# Altium PCB PCB1.PcbDoc
Units mil, origin at the board's own origin, x right, y up, seen from the top; angles counter-clockwise.
Board outline 3100 x 2500 mil, 2 copper layers (Top Layer, Bottom Layer); 53 components, 42 nets, 219 pads, 60 vias.
Unrouted connection lines stored in the file: 36.
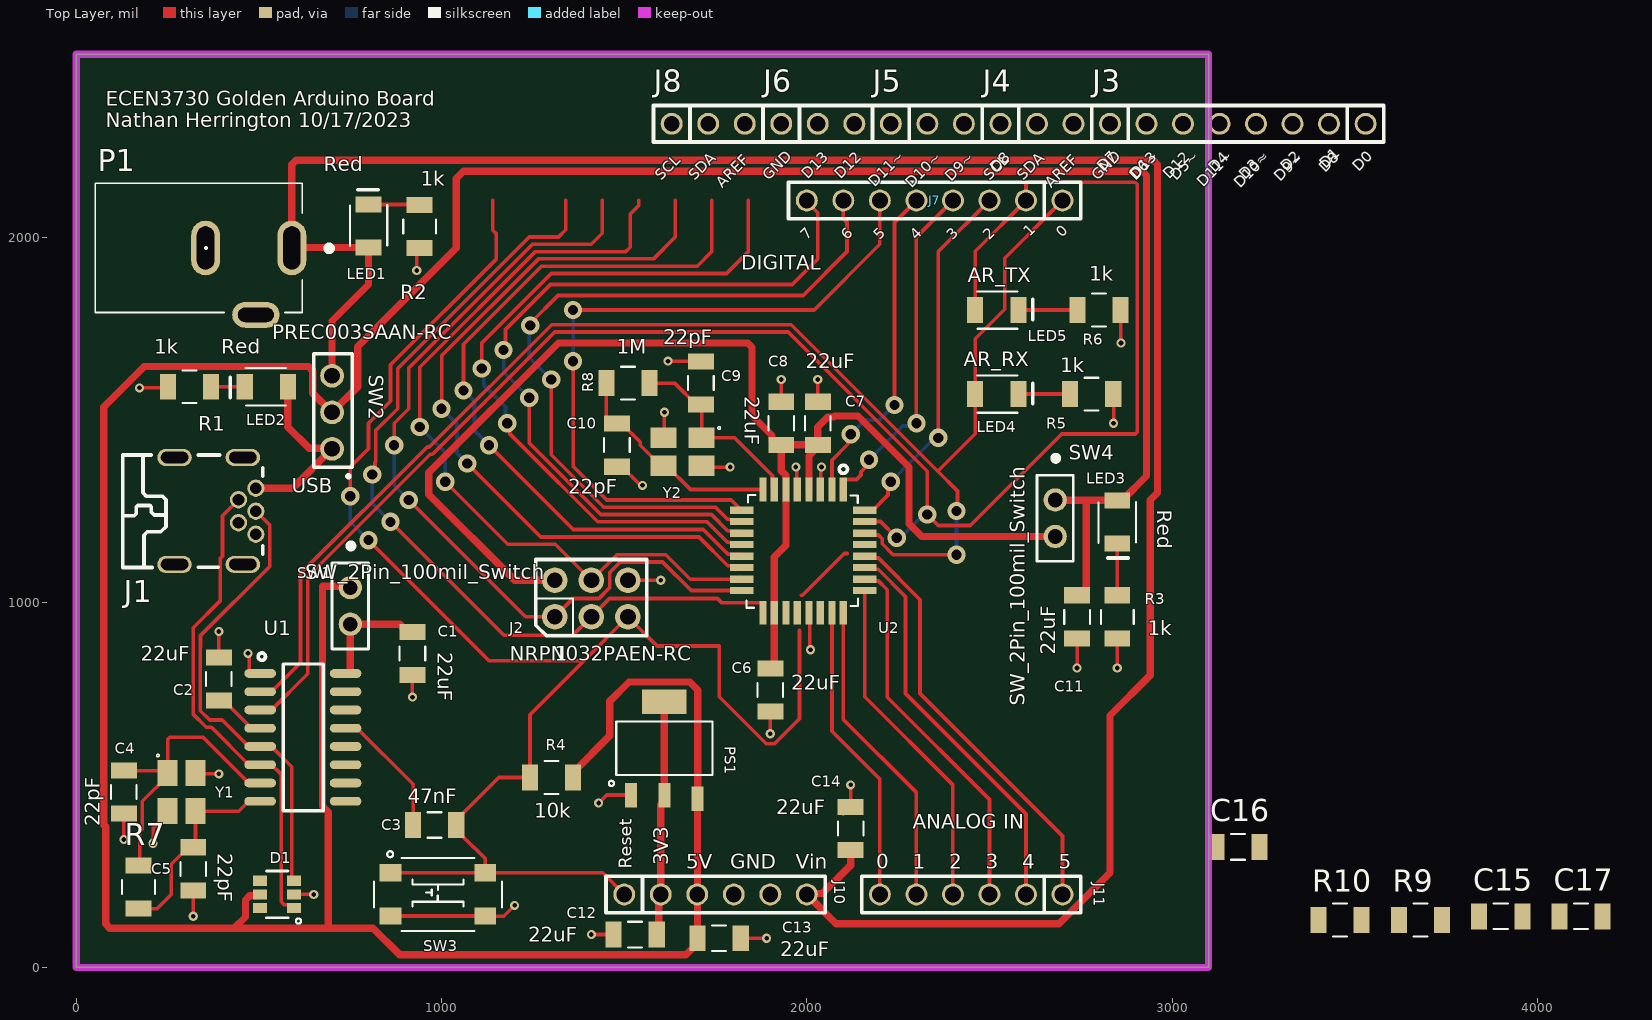
[diagram p0: Top Layer view]
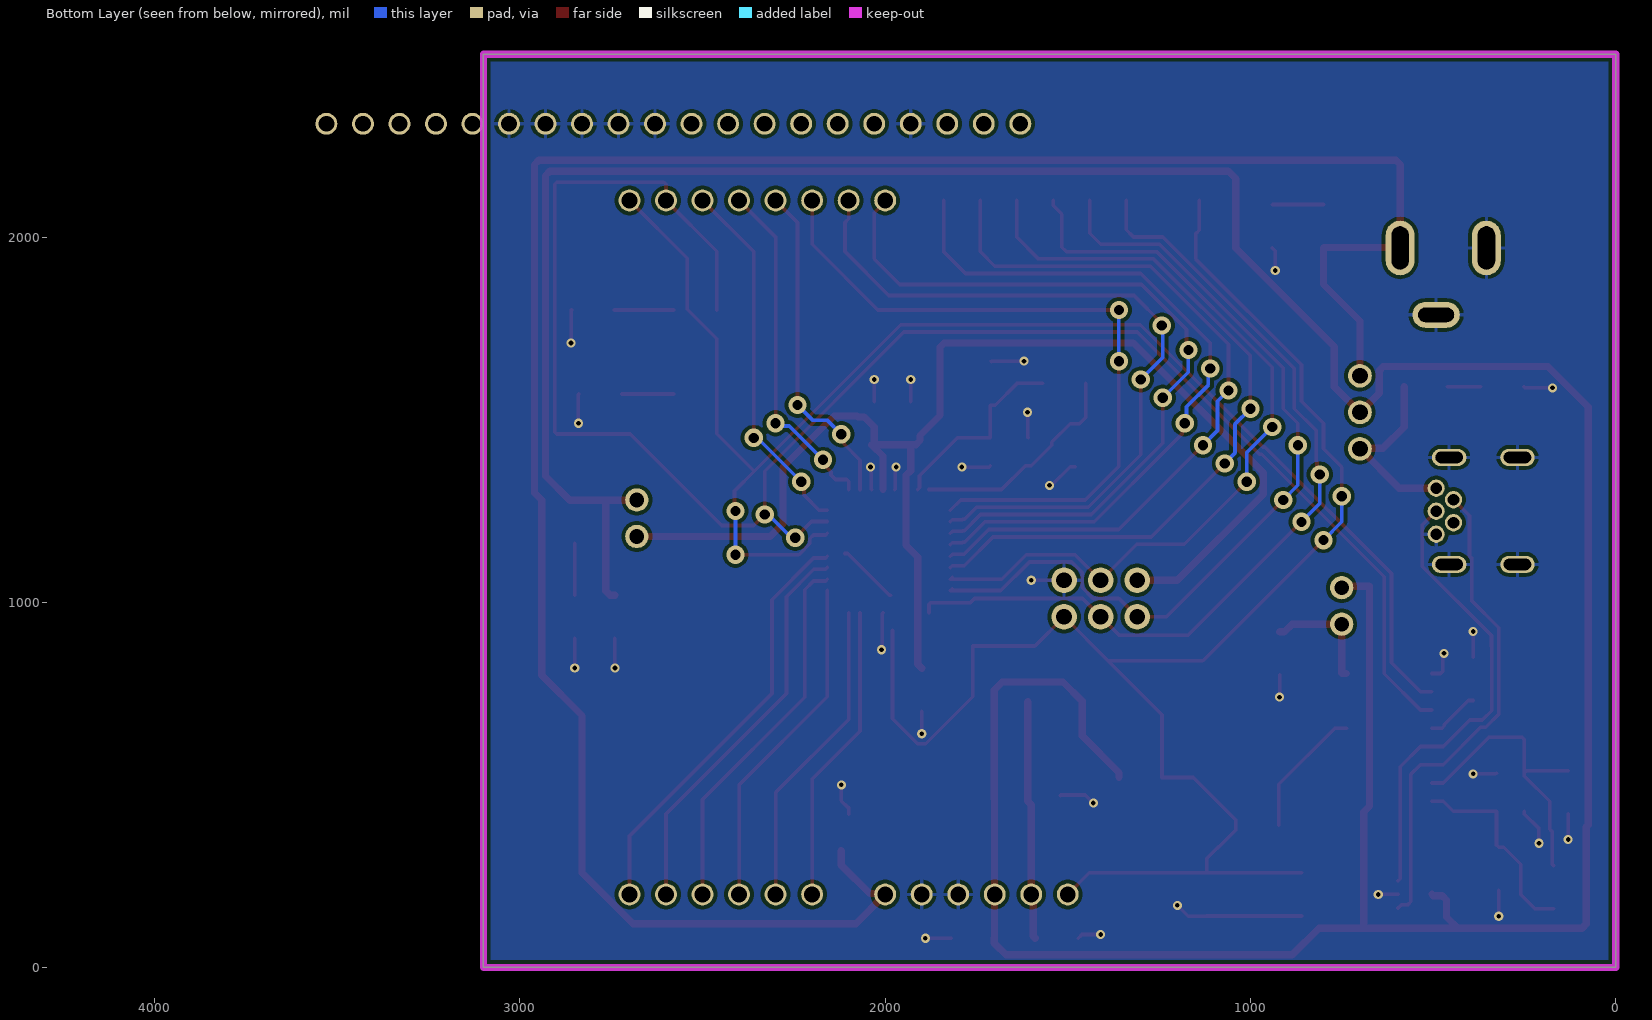
[diagram p1: Bottom Layer view, seen from below]
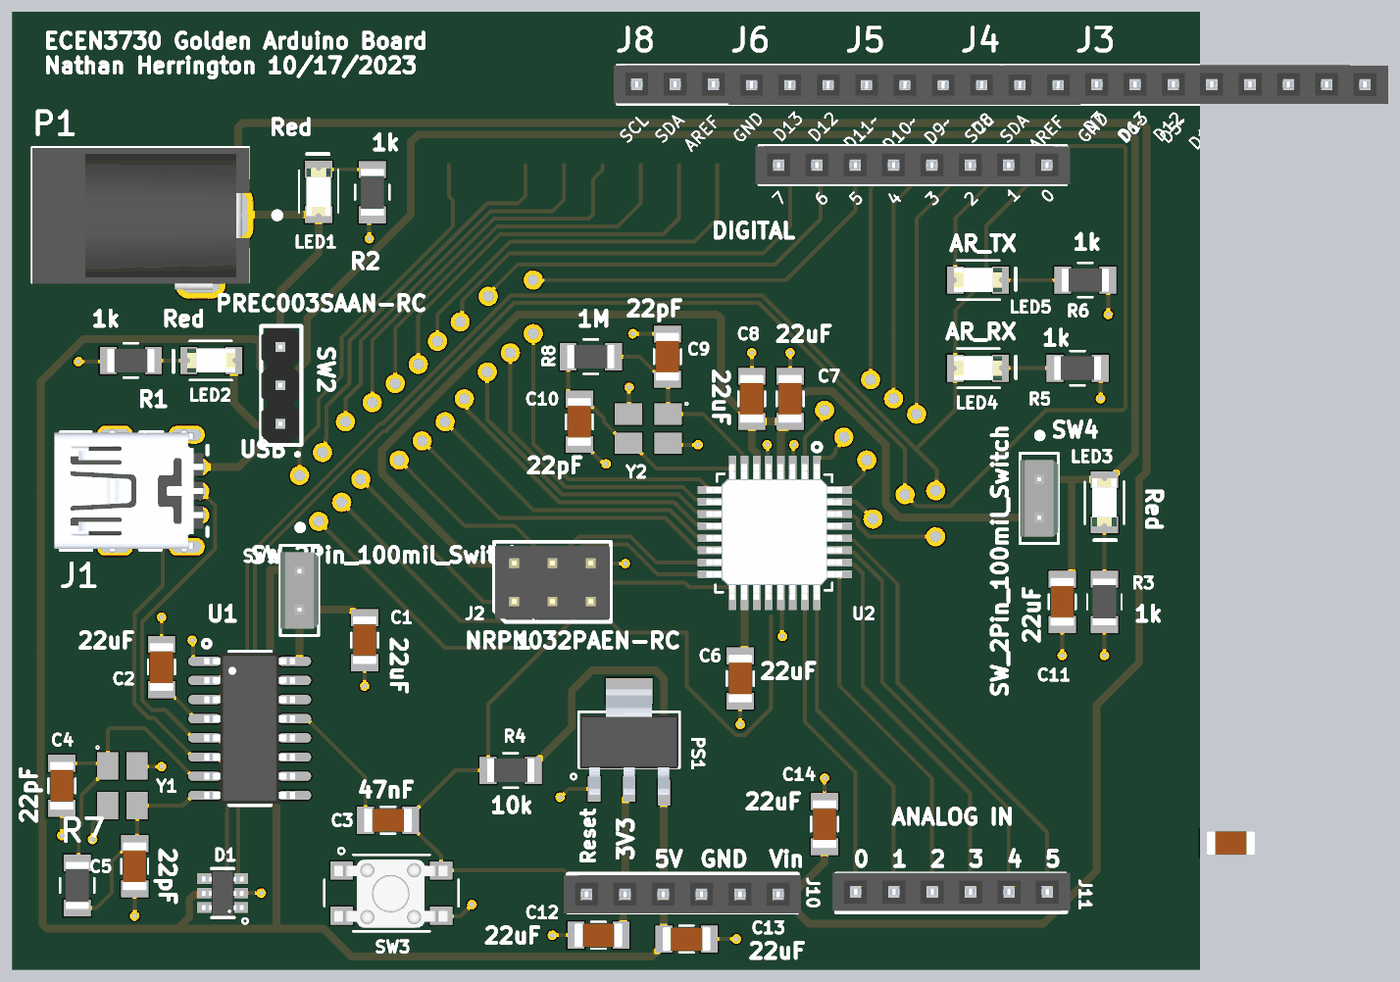
[diagram p2: 3D render of the assembled board from above, using the file's embedded part models]

## Layer stack, top to bottom
Top Solder: solder mask 0.4, Solder Resist, Dk 3.5
Top Layer: signal copper 1.4
Dielectric 1: dielectric 12.6, FR-4, Dk 4.8
Bottom Layer: signal copper 1.4
Bottom Solder: solder mask 0.4, Solder Resist, Dk 3.5

## Board outline
0,0 0,2500 3100,2500 3100,0

## Design rules (kind name [scope] priority, off if disabled: settings)
Clearance [All] p1: gap=10 ignorepadtopadclearanceinfootprint=FALSE except(0: Arc-Hole Track-Hole SMDPad-Hole THPad-Hole Via-Hole Fill-Hole Poly-Hole Region-Hole Text-Hole)
PolygonConnect [All] p1: connectstyle=Relief reliefconductorwidth=10 reliefentries=4 polygonreliefangle="90 Angle" airgapwidth=10
RoutingVias [All] p1: holewidth=28 width=50 viastyle="Through Hole" minholewidth=28 minwidth=50 maxholewidth=28 maxwidth=50
SolderMaskExpansion [All] p1: expansion=4 istentingtop=FALSE
Width "Schematic Width Constraint_5" [InNet('NetC6_1')] p1: maxlimit=100 minlimit=20 preferedwidth=20 minimp=50.000000 maximp=50.000000 favimp=50.000000
Width "Schematic Width Constraint_4" [InNet('3.3V')] p2: maxlimit=100 minlimit=20 preferedwidth=20 minimp=50.000000 maximp=50.000000 favimp=50.000000
Width "Schematic Width Constraint_3" [InNet('VIN')] p3: maxlimit=100 minlimit=20 preferedwidth=20 minimp=50.000000 maximp=50.000000 favimp=50.000000
Width "Schematic Width Constraint_2" [InNet('NetC1_1')] p4: maxlimit=100 minlimit=20 preferedwidth=20 minimp=50.000000 maximp=50.000000 favimp=50.000000
Width "Schematic Width Constraint_1" [InNet('5V')] p5: maxlimit=100 minlimit=20 preferedwidth=20 minimp=50.000000 maximp=50.000000 favimp=50.000000
Width "Schematic Width Constraint" [InNet('USBVCC')] p6: maxlimit=100 minlimit=20 preferedwidth=20 minimp=50.000000 maximp=50.000000 favimp=50.000000
Width [All] p7: maxlimit=10 minlimit=10 preferedwidth=10
30 further rules are at their usual default settings.

## Components (designator, comment, footprint, x,y, rotation, side; value= is the part's Value field where it differs from the comment)
C1 "22uF" 1206_Passive_Capacitor 920,860 r270 top
C2 "22uF" 1206_Passive_Capacitor 390,790 r270 top
C3 "47nF" 1206_Passive_Capacitor 981,390 r0 top
C4 "22pF" 1206_Passive_Capacitor 130,480 r90 top
C5 "22pF" 1206_Passive_Capacitor 320,270 r90 top
C6 "22uF" 1206_Passive_Capacitor 1900,760 r270 top
C7 "22uF" 1206_Passive_Capacitor 2030,1490 r90 top
C8 "22uF" 1206_Passive_Capacitor 1930,1490 r90 top
C9 "22pF" 1206_Passive_Capacitor 1710,1600 r90 top
C10 "22pF" 1206_Passive_Capacitor 1480,1430 r270 top
C11 "22uF" 1206_Passive_Capacitor 2740,960 r90 top
C12 "22uF" 1206_Passive_Capacitor 1530,90 r180 top
C13 "22uF" 1206_Passive_Capacitor 1760,80 r0 top
C14 "22uF" 1206_Passive_Capacitor 2120,380 r270 top
C15 "22uF" 1206_Passive_Capacitor 3900,140 r0 top
C16 "1uF" 1206_Passive_Capacitor 3180,330 r0 top
C17 "22uF" 1206_Passive_Capacitor 4120,140 r0 top
D1 "SRV05-4-P-T7" TVS 550,200 r180 top value="TVS DIODE 5.5V 6TSOP"
J1 "USB Mini" USB_MINI_B 380,1250 r270 top value="USB mini B"
J2 "NRPN032PAEN-RC" ICSP 1310,960 r90 top
J3 "PPTC081LFBN-RC" 8_PIN_ARD-DIG_100MIL 2830,2310 r0 top value=Female
J4 "PPTC101LFBN-RC" 10_PIN_ARDUINO_100MIL 2530,2310 r0 top value=Female
J5 "PPTC061LFBN-RC" "6_PIN_100MIL -Female" 2230,2310 r0 top value=Female
J6 "PPTC061LFBN-RC" "6_PIN_100MIL -Female" 1930,2310 r0 top value=Female
J7 "PPTC081LFBN-RC" 8_PIN_ARD-DIG_100MIL 2700,2100 r180 top value=Female
J8 "PPTC101LFBN-RC" 10_PIN_ARDUINO_100MIL 1630,2310 r0 top value=Female
J10 "PPTC061LFBN-RC" "6_PIN_100MIL -Female" 1500,200 r0 top value=Female
J11 "PPTC061LFBN-RC" "6_PIN_100MIL -Female" 2700,200 r180 top value=Female
LED1 "Red" LED_1206 800,2030 r90 top
LED2 "Red" LED_1206 520,1590 r180 top
LED3 "Red" LED_1206 2850,1220 r270 top
LED4 "Red" LED_1206 2520,1570 r0 top
LED5 "Red" LED_1206 2520,1800 r0 top
P1 "Power Jack" Power_Jack 590,1970 r180 top value="CONN PWR JACK 2X5.5MM SOLDER"
PS1 "AMS1117-3.3" LDO 1610,600 r0 top value="IC REG LINEAR 3.3V 800MA SOT223"
R1 "1k" 1206_Passive_Resitor 310,1590 r180 top value="1K Ohm"
R2 "1k" 1206_Passive_Resitor 940,2029 r270 top value="1K Ohm"
R3 "1k" 1206_Passive_Resitor 2850,960 r270 top value="1K Ohm"
R4 "10k" 1206_Passive_Resitor 1301,520 r0 top value=10KOhm
R5 "1k" 1206_Passive_Resitor 2780,1570 r0 top value="1K Ohm"
R6 "1k" 1206_Passive_Resitor 2800,1800 r0 top value="1K Ohm"
R7 "1M" 1206_Passive_Resitor 170,220 r270 top value="1M Ohm"
R8 "1M" 1206_Passive_Resitor 1510,1600 r180 top value="1M Ohm"
R9 "10k" 1206_Passive_Resitor 3680,130 r0 top value=10KOhm
R10 "10k" 1206_Passive_Resitor 3460,130 r0 top value=10KOhm
SW1 "SW_2Pin_100mil_Switch" 2Pin-Header-Conn 750,1040 r270 top
SW2 "PREC003SAAN-RC" 3_PIN_100mil 700,1420 r90 top value="CONN HEADER VERT 3POS 2.54MM"
SW3 "TL3305AF160QG" Switch_JLC 990,200 r0 top
SW4 "SW_2Pin_100mil_Switch" 2Pin-Header-Conn 2680,1280 r270 top
U1 "CH340G" "USB to serial" 620,630 r270 top value="USB to Serial"
U2 "ATMEGA328P-ANR" ATMega328P 1990,1140 r90 top value="IC MCU 8BIT 32KB FLASH 32TQFP"
Y1 "X322512MSB4SI" "Crystal resonator" 290,480 r270 top value=12MHz
Y2 "X322516MLB4SI" "Crystal resonator" 1660,1410 r180 top value=16MHz

## Footprints (in the part's own frame and the unit in brackets; to place one, negate y for a bottom-side part, rotate by r counter-clockwise, add the part's x,y. Pads: shape width x height; smd on the part's side, far side on the other; paste and mask are expansions set on the pad)
2Pin-Header-Conn [mm]
  round 1.62 hole 1.02: 1(0,0) 2(2.54,0)
  silkscreen extent -3.03,-1.27 4.26,1.26, body extent -1.27,-1.27 3.81,1.27, height 8.13
3_PIN_100mil [mm]
  round 1.65 hole 1.1: 1(0,0) 2(2.54,0) 3(5.08,0)
  silkscreen extent -2,-1.4 6.6,1.27, body extent -1.14,-1.27 6.48,1.27, height 8.38
"6_PIN_100MIL -Female" [mil]
  round 60 hole 43.31: 1(0,0) 2(100,0) 3(200,0) 4(300,0) 5(400,0) 6(500,0)
  silkscreen extent -50,-50 550,50, body extent -61,-53 559,47, height 335
8_PIN_ARD-DIG_100MIL [mil]
  round 60 hole 43.31: 1(0,0) 2(100,0) 3(200,0) 4(300,0) 5(400,0) 6(500,0) 7(600,0) 8(700,0)
  silkscreen extent -50,-50 750,50, body extent -60,-50 760,50, height 335
10_PIN_ARDUINO_100MIL [mil]
  round 60 hole 43.31: 1(0,0) 2(100,0) 3(200,0) 4(300,0) 5(400,0) 6(500,0) 7(600,0) 8(700,0) 9(800,0) 10(900,0)
  silkscreen extent -50,-50 950,50, body extent -60,-49 960,51, height 335
1206_Passive_Capacitor [mil]
  rect 44x71 smd: 1(-59,0) 2(59,0)
  silkscreen extent -19,-35 19,35, body extent -63,-31 63,32, height 50
1206_Passive_Resitor [mil]
  rect 44x71 smd: 1(-59,0) 2(59,0)
  silkscreen extent -19,-45 19,45, body extent -61,-31 61,31, height 26
ATMega328P [mm]
  rect 1.65x0.508 smd mask+0.025: 1(4.28,-2.794) 2(4.28,-2.007) 3(4.28,-1.194) 4(4.28,-0.406) 5(4.28,0.406) 6(4.28,1.194) 7(4.28,2.007) 8(4.28,2.794) 17(-4.28,2.794) 18(-4.28,2.007) 19(-4.28,1.194) 20(-4.28,0.406) 21(-4.28,-0.406) 22(-4.28,-1.194) 23(-4.28,-2.007) 24(-4.28,-2.794)
  rect 0.508x1.65 smd mask+0.025: 9(2.843,4.28) 10(2.056,4.28) 11(1.243,4.28) 12(0.455,4.28) 13(-0.357,4.28) 14(-1.145,4.28) 15(-1.958,4.28) 16(-2.745,4.28) 25(-2.745,-4.28) 26(-1.958,-4.28) 27(-1.145,-4.28) 28(-0.357,-4.28) 29(0.455,-4.28) 30(1.243,-4.28) 31(2.056,-4.28) 32(2.843,-4.28)
  silkscreen extent -3.94,-3.81 5.97,3.94, body extent -4.45,-4.47 4.55,4.53, height 1.16
"Crystal resonator" [mm]
  rect 1.8x1.4 smd: 1(-1.32,-1.02) 2(1.32,-1.02) 3(1.32,0.92) 4(-1.32,0.92)
  silkscreen extent -2.63,-1.79 -2.45,-1.61, body extent -1.65,-1.2 1.65,1.2, height 0.8
ICSP [mil]
  round 70 hole 43.31: 1(0,0) 2(0,-100) 3(0,-200) 4(100,0) 5(100,-100) 6(100,-200)
  silkscreen extent -52,-252 157,52, body extent -44,-250 146,50, height 330
LDO [mm]
  rect 0.838x1.7 smd: 1(-2.311,-3.25) 2(0,-3.25) 3(2.311,-3.5)
  rect 3.099x1.7 smd: 4(0,3.25)
  silkscreen extent -3.86,-2.62 3.35,1.85, body extent -3.25,-3.65 3.25,3.35, height 1.85
LED_1206 [mil]
  rect 44x71 smd: 1(-59,0) 2(59,0)
  silkscreen extent -54,-51 99,51, body extent -63,-31 63,31, height 28
Power_Jack [mm]
  oval 2x3.8 hole 1.2 slot 3 at 90 deg: 1(0,0) 2(6,0)
  oval 3.3x1.8 hole 1 slot 2.5 at 0 deg: 3(2.5,4.65)
  silkscreen extent -2.79,-4.5 13.68,4.5, body extent -0.76,-4.45 13.64,4.95, height 11.49
Switch_JLC [mm]
  rect 1.5x1.2 smd: 1(-3.3,1.5) 2(3.3,1.5) 3(-3.3,-1.5) 4(3.3,-1.5)
  silkscreen extent -4.44,-2.54 4.45,3, body extent -3.8,-2.29 3.7,2.21, height 3.7
TVS [mm]
  rect 1x0.7 smd mask+0.025: 1(-1.162,0.95) 2(-1.162,0) 3(-1.162,-0.95) 4(1.2,-0.95) 5(1.2,0) 6(1.2,0.95)
  silkscreen extent -1.65,-1.63 0.76,2.03, body extent -1.37,-1.44 1.38,1.46, height 1.1
"USB to serial" [mil]
  oval 24x86.61 smd: 1(-175,-117) 2(-125,-117) 3(-75,-117) 4(-25,-117) 5(25,-117) 6(75,-117) 7(125,-117) 8(175,-117) 9(175,117) 10(125,117) 11(75,117) 12(25,117) 13(-25,117) 15(-125,117) 16(-175,117) ""(-75,117)
  silkscreen extent -231,-122 201,56, body extent -197,-118 197,118, height 71
USB_MINI_B [mm]
  round 1.2 hole 0.8: 1(-1.58,2.826) 2(-0.78,1.622) 3(0.02,2.826) 4(0.82,1.622) 5(1.62,2.826)
  oval 1.2x2.4 hole 0.8 slot 1.9 at 90 deg: 6(-3.72,1.924) 7(3.72,1.924) 8(-3.72,-2.826) 9(3.72,-2.826)
  silkscreen extent -3.89,-6.42 3.93,3.3, body extent -4.04,-6.83 4.06,3.02, height 3.98

## Part data
C1 C2 C6 C7 C8 C11 C12 C13 C14 C15 C17: library part C_22uF_1206, "22uF ±10% 25V X5R 1206 Multilayer Ceramic Capacitors MLCC - SMD/SMT RoHS", LCSC Part#=C12891, MFR Part #=CL31A226KAHNNNE, Datasheet=https://datasheet.lcsc.com/lcsc/1811031514_Samsung-Electro-Mechanics-CL31A226KAHNNNE_C12891.pdf, Type=basic
C3: library part C_47nF_1206, "47nF ±5% 50V C0G 1206 Multilayer Ceramic Capacitors MLCC - SMD/SMT RoHS", LCSC Part#=C21812, MFR Part #=GRM31M5C1H473JA01L, Datasheet=https://datasheet.lcsc.com/lcsc/1810201313_Murata-Electronics-GRM31M5C1H473JA01L_C21812.pdf, Type=Extended
C4 C5 C9 C10: library part C_22pF_1206, "22pF ±5% 1kV C0G 1206 Multilayer Ceramic Capacitors MLCC - SMD/SMT RoHS", LCSC Part#=C107174, MFR Part #=CC1206JKNPOCBN220, Datasheet=https://datasheet.lcsc.com/lcsc/1810241219_YAGEO-CC1206JKNPOCBN220_C107174.pdf, Type=Extended
C16: library part C_1uF_1206, "MULTILAYER CERAMIC CAPACITORS MLCC - SMD/SMT 1UF 50V 1206 ROHS", LCSC Part#=C1848, MFR Part #=CL31B105KBHNNNE, Digikey Link=https://www.digikey.com/product-detail/en/C1206C105M4RACTU/399-8150-1-ND/3471873/?itemSeq=304982366, Type=Basic
D1: library part D_TVS_Diode, "TVS SOT-23-6 ROHS", LCSC Part#=C85364, Datasheet=https://datasheet.lcsc.com/szlcsc/ProTek-Devices-SRV05-4-P-T7_C85364.pdf, MFR Part #=SRV05-4-P-T7, Type=Basic
J1: library part J_USB_B_Mini, "Through Hole USB Connectors RoHS", LCSC Part#=C46398, MFR Part #=920-462A2021D10102, Datasheet=https://datasheet.lcsc.com/szlcsc/2103081233_Jing-Extension-of-the-Electronic-Co-920-462A2021D10102_C46398.pdf, Type=Extended
J2: library part J_ICSP, "Connector Header Through Hole 6 position 0.079\" (2.00mm)", LCSC Part#=C124384, Digikey Link=https://www.digikey.com/product-detail/en/NRPN032PAEN-RC/S5801-03-ND/804955/?itemSeq=304982355, MFR Part #=NRPN032PAEN-RC, Type=Extended
J3 J7: library part JF_8_PIN_FEMA_ARD-Dig, "8 Position Header Connector 0.100\" (2.54mm) Through Hole Tin", LCSC Part#=C27438, Digikey Link=https://www.digikey.com/product-detail/en/PPTC081LFBN-RC/S7006-ND/810147/?itemSeq=304982354, MFR Part #=PPTC081LFBN-RC, Type=Extended
J4 J8: library part JF_10_PIN_FEMA_ARDUINO, "10 Position Header Connector 0.100\" (2.54mm) Through Hole Tin", LCSC Part#=C225507, Digikey Link=https://www.digikey.com/product-detail/en/PPTC101LFBN-RC/S7008-ND/810149/?itemSeq=304982352, MFR Part #=PPTC101LFBN-RC, Type=Extended
J5 J6 J10 J11: library part JF_6_PIN_FEMALE, "6 Position Header Connector 0.100\" (2.54mm) Through Hole Tin", LCSC Part#=C40877, Digikey Link=https://www.digikey.com/product-detail/en/PPTC061LFBN-RC/S7004-ND/810145/?itemSeq=304982353, MFR Part #=PPTC061LFBN-RC, Type=Extended
LED1 LED2 LED3 LED4 LED5: library part LED_RED_1206, "Red 621~631nm 1206 Light Emitting Diodes (LED) RoHS", LCSC Part#=C93133, MFR Part #=15-21/R6C-FQ1R1B/2T, Datasheet=https://datasheet.lcsc.com/szlcsc/1811151241_Everlight-Elec-15-21-R6C-FQ1R1B-2T_C93133.pdf, Type=Extended
P1: library part "P_Power Jack", "Power Barrel Connector Jack 2.10mm ID (0.083\"), 5.50mm OD (0.217\") Through Hole, Right Angle", LCSC Part#=C136744, MFR Part #=PJ-102A, Digikey Link=https://www.digikey.com/product-detail/en/PJ-102A/CP-102A-ND/275425/?itemSeq=304982367, Type=Extended
PS1: library part PS_AMS_LDO_3v3, "LOW DROPOUT REGULATORS(LDO) POSITIVE FIXED 1.3V @ 800MA 15V 3.3V 1A SOT-223 ROHS", LCSC Part#=C6186, MFR Part #=AMS1117-3.3, Type=Basic
R1 R2 R3 R5 R6: library part R_1K_1206, "CHIP RESISTOR - SURFACE MOUNT 1KOHMS ±1% 1/4W 1206 ROHS", LCSC Part#=C4410, MFR Part #=RNCP1206FTD1K00CT, Digikey Link=https://www.digikey.com/product-detail/en/RNCP1206FTD1K00/RNCP1206FTD1K00CT-ND/2240675/?itemSeq=304982373, Type=Basic
R4 R9 R10: library part R_10KOhm_1206, "10 kOhms ±5% 0.25W, 1/4W Chip Resistor 1206 (3216 Metric) Automotive AEC-Q200 Thick Film", LCSC Part#=C17902, MFR Part #=RMCF1206FT10K0, Digikey Link=https://www.digikey.com/en/products/detail/stackpole-electronics-inc/RMCF1206FT10K0/1759669, Type=Basic
R7 R8: library part R_1M_1206, "CHIP RESISTOR - SURFACE MOUNT 1MOHMS ±1% 1/4W 1206 ROHS", LCSC Part#=C17927, MFR Part #=RMCF1206JT1M00, Digikey Link=https://www.digikey.com/product-detail/en/RMCF1206JT1M00/RMCF1206JT1M00CT-ND/1942830/?itemSeq=304982358, Type=Basic
SW1 SW4: "2Pin Header", LCSC Part#=C124375, Type=Extended
SW2: library part SW_3Pin_100mil_Switch, "Connector Header Through Hole 3 position 0.100\" (2.54mm)", LCSC Part#=C49257, Digikey Link=https://www.digikey.com/product-detail/en/PREC003SAAN-RC/S1012EC-03-ND/2774851/?itemSeq=304982371, MFR Part #=PREC003SAAN-RC, Type=Extended
SW3: library part SW_Push_Button_JLC, "Tactile Switch SPST-NO Top Actuated Surface Mount", LCSC Part#=C2837550, MFR Part #=KH-4.5X4.5X4.3H-STM, Datasheet=https://datasheet.lcsc.com/lcsc/2106081532_Shenzhen-Kinghelm-Elec-KH-4.5X4.5X4.3H-STM_C2837550.pdf, Type=Extended
U1: library part U_USBtoSerial, "Transceiver USB 2.0 2Mbps SOP-16_150mil USB ICs RoHS", LCSC Part#=C14267, Datasheet=https://datasheet.lcsc.com/lcsc/2008191806_WCH-Jiangsu-Qin-Heng-CH340G_C14267.pdf, MFR Part #=CH340G, Type=Basic
U2: library part U_ATMega328P, "AVR AVR® ATmega Microcontroller IC 8-Bit 20MHz 32KB (16K x 16) FLASH 32-TQFP (7x7)", LCSC Part#=C14877, MFR Part #=ATMEGA328P-AU, Digikey Link=https://www.digikey.com/product-detail/en/ATMEGA328P-ANR/ATMEGA328P-ANRCT-ND/2774230/?itemSeq=304982365, Type=Basic
Y1: library part X_12MHz_Res, "SMD Crystal Resonators 12MHz ±10ppm SMD-3225_4P RoHS", LCSC Part#=C9002, Datasheet=https://datasheet.lcsc.com/szlcsc/Yangxing-Tech-X322512MSB4SI_C9002.pdf, MFR Part #=X322512MSB4SI, Type=Basic
Y2: library part X_16Mhz_Res, "±10ppm 16000000Hz -40℃~85℃ 贴片无源晶振 60Ω 9pF SMD3225-4P Crystals ROHS", LCSC Part#=C13738, MFR Part #=X322516MLB4SI, Type=Basic

## Via types
v1: diameter 25, hole 13, Top Layer to Bottom Layer, 30 vias
v2: diameter 50, hole 28, Top Layer to Bottom Layer, 30 vias

## Nets (pads, with @x,y where several pads share a name; then routed paths per layer and width w, separated by ;. In a path a pad name is that pad's centre, name@x,y a point inside that pad or via, vN(x,y) a via of type N, cw(c..) or ccw(c..) an arc to the next point about the centre after c; other vN are vias at no path point)
3.3V: C12.1 C17.2 J10.2 PS1.2 PS1.4 | length 656.7
  Top Layer w20: C12.1@1589,80 1594.5,85.5 1594.5,194.5 J10.2 1600,445.08 1610,455.08 PS1.2 PS1.4
5V: C11.2 C13.1 D1.5 J10.3 LED3.1 PS1.3 R4.2 R9.1 R10.1 SW1.1 SW2.2 SW4.1 | length 10281.8
  Top Layer w20: D1.5 499.13,196.38 474.79,196.38 463.07,184.66 463.07,138.07 432.5,107.5 ; SW1.1 746.31,1043.69 673.69,1043.69 673.69,441.75 690,425.44 690,107.5 ; R4.2 1360,533.5 1460.6,634.1 1460.6,728.85 1513.17,781.42 1679.28,781.42 1701,759.7 PS1.3 1700.5,461.7 1700.5,200.5 J10.3 1700.5,199.5 1700.5,80.5 C13.1 1701,66.5 1669,34.5 885.09,34.5 812.09,107.5 690,107.5 ; SW4.1 2680.5,1279.5 2765,1279.5 ; C11.2 2753,1019 2765,1031 2765,1279.5 ; 432.5,107.5 91.72,107.5 80,119.22 80,385.22 74.5,390.72 74.5,1534.5 185.5,1645.5 635.8,1645.5 647.52,1633.78 647.52,1572.48 SW2.2 770,1590 770,1700 1040,1970 1040,2160 1060,2180 2918.28,2180 2930,2168.28 2930,1345.5 2863.5,1279 LED3.1 2849.5,1279.5 2765,1279.5 ; 432.5,107.5 690,107.5
16MHz1: C9.1 R8.1 U2.7 Y2.1 | length 534
  Top Layer w10: R8.1 1637.5,1600 1698.47,1539.03 1711.97,1539.03 Y2.1 1802.04,1450.16 1906,1346.2 1906,1313.5 U2.7
16MHz2: C10.1 R8.2 U2.8 Y2.3 | length 609.8
  Top Layer w10: R8.2 1451,1506 1468,1489 C10.1 1493.5,1489 1544.05,1438.45 1544.05,1429.89 1600.16,1373.78 Y2.3 1615.91,1373.78 1681.18,1308.5 U2.8
ATMEGARESET: C3.2 C16.1 J2.3 J10.1 R4.1 SW3.1 SW3.2 U2.29 | length 4629.8
  Top Layer w10: v2(750,1290) 750,1370 800,1420 800,1490 860,1550 860,1650 1150,1940 1150,2008.24 1140,2018.24 1140,2100 ; v2(800,1170) 1130,840 1390,840 ; SW3.1 SW3.2 ; J10.1 1440.94,259.06 SW3.2 ; 1980,922.5 1980,681.11 1911.39,612.5 1888.61,612.5 1760.04,741.06 1760.04,879.96 1590.04,879.96 J2.3 1390,840 ; 1985,1018.98 1987.86,1018.98 2102.27,1133.39 2110.56,1133.39 2111.02,1132.93 ; SW3.2 1119.92,297.68 1089.01,328.59 1087.91,328.59 1040,376.5 C3.2 1040,403.5 1156.5,520 R4.1 1242,692 1390,840
  Bottom Layer w10: v2(750,1290) 750,1220 v2(800,1170)
CH340RXD: J7.2 LED5.1 U1.3 U2.31 | length 4994.4
  Top Layer w10: U1.3 534.31,705 633.78,804.47 633.78,1070.09 968.73,1405.05 974.75,1405.05 1309.71,1740 1948.89,1740 2330,1358.89 v2(2330,1240) 2360,1210 2447.71,1210 2698.14,1460.43 2899.14,1460.43 2905,1466.29 2905,2144.14 2899.14,2150 2605.86,2150 2600,2144.14 J7.2 2461,1961 LED5.1 ; U2.31 2201.79,1220.93 v2(2246.36,1176.36)
  Bottom Layer w10: v2(2246.36,1176.36) 2250,1180 2250,1184.14 2255.86,1190 2261.43,1184.43 2264.43,1184.43 2320,1240 v2(2330,1240)
CH340TXD: J7.1 LED4.1 U1.2 U2.30 | length 3999.8
  Top Layer w10: U1.2 534.31,755 613.78,834.47 613.78,1078.38 960.45,1425.05 966.47,1425.05 1301.42,1760 1957.18,1760 2358.59,1358.59 ; U2.30 2163.5,1183.93 2196.2,1183.93 2206.36,1173.77 2206.36,1159.79 2236.15,1130 v2(2410,1130) ; v2(2410,1250) 2412.35,1252.35 2412.35,1304.83 2358.59,1358.59 ; J7.1 2542,1942 2542,1802.29 2461,1721.29 LED4.1 2461,1461 2358.59,1358.59
  Bottom Layer w10: v2(2410,1130) v2(2410,1250)
GND: C1.2 C2.1 C4.1 C5.1 C6.2 C7.2 C8.2 C9.2 C10.2 C11.1 C12.2 C13.2 C14.1 C15.1 C16.2 C17.1 D1.2 J1.5 J1.6 J1.7 J1.8 J1.9 J2.6 J3.1 J3.2 J3.3 J3.4 J3.5 J3.6 J3.7 J3.8 J4.1 J4.2 J4.3 J4.4 J4.5 J4.6 J4.7 J4.8 J4.9 J4.10 J5.1 J5.2 J5.3 J5.4 J5.5 J5.6 J6.1 J6.2 J6.3 J6.4 J6.5 J6.6 J8.4 J10.4 J10.5 P1.2 P1.3 PS1.1 R1.2 R2.2 R3.2 R5.2 R6.2 SW3.3 SW3.4 U1.1 U2.3 U2.5 U2.21 Y1.2 Y1.4 Y2.2 Y2.4 | length 2571.9
  Top Layer w10: v1(130,350) C4.1 ; v1(172.98,1587.02) 248.02,1587.02 R1.2 ; v1(210,340) 210,380.32 249.84,420.16 Y1.2 ; v1(320,140) C5.1 ; Y1.4 328.19,530 v1(390,530) ; C2.1 v1(390,920) ; v1(470,860) 472.87,857.13 472.87,811.47 479.34,805 U1.1 ; D1.2 v1(650,200) ; SW3.3 SW3.4 1120.87,140 1170,140 v1(1200,170) ; C1.2@919.36,801 920,800.36 v1(920,740) ; v1(932.02,1907.98) 932.02,1962.02 R2.2 ; v1(1410,90) 1461,90 C12.2@1471,80 ; v1(1430,450) 1452.05,472.05 PS1.1 1520,471.05 PS1.1@1520,470 ; C10.2 1493.5,1371 1541.63,1322.87 1547.13,1322.87 v1(1550,1320) ; J2.6 v1(1600,1060) ; Y2.2 1610,1452.13 v1(1610,1520) ; v1(1620,1660) 1709,1660 C9.2 ; Y2.4 1715.75,1370 v1(1790,1370) ; C13.2 v1(1890,80) ; v1(1900,640) C6.2 ; C8.2 v1(1930,1610) ; v1(1970,1370) 1972,1368 1972,1310.5 U2.5 ; U2.21 2008,969.5 2008,872 v1(2010,870) ; C7.2 v1(2030,1610) ; U2.3 2038.5,1310 2038.5,1368.5 v1(2040,1370) ; C14.1@2100,419 2100,439 2103,439 2120,456 v1(2120,500) ; v1(2740,820) C11.1 ; R5.2 2840,1569 v1(2840,1490) ; v1(2850,820) R3.2 ; R6.2 2860,1799 v1(2860,1710)
NetC1_1: C1.1 SW1.2 U1.16 | length 325.6
  Top Layer w20: U1.16 748.15,805 750,806.85 SW1.2 885.5,940 906.5,919 C1.1
NetC2_2: C2.2 U1.4 | length 146.8
  Top Layer w10: C2.2 403.5,731 469.01,665.49 469.01,661.47 475.48,655 U1.4
NetC3_1: C3.1 U1.13 | length 360
  Top Layer w10: U1.13 768.31,655 922,501.31 C3.1
NetC4_2: C4.2 R7.1 U1.7 Y1.1 | length 808.3
  Top Layer w10: C4.2 242.81,539 Y1.1 ; R7.1 173.86,282.86 173.86,372.05 180.5,378.7 180.5,454.75 249.84,524.09 Y1.1 ; U1.7 471.69,505 346.69,630 255.7,630 249.84,624.14 Y1.1
NetC5_2: C5.2 R7.2 U1.8 Y1.3 | length 557.5
  Top Layer w10: R7.2 221,161 260,200 260,282.5 306.5,329 C5.2 326.22,335.22 Y1.3 444.72,428.03 471.69,455 U1.8
NetC6_1: C6.1 C7.1 C8.1 J2.4 SW4.2 U2.4 U2.6 U2.18 | length 3663.6
  Top Layer w20: J2.4 1200,1060 965,1295 965,1355 1320,1710 1838.28,1710 1850,1698.28 1850,1511 1904.5,1456.5 1904.5,1443 1916.5,1431 C8.1 ; C6.1 1911,830 U2.18 1911,1124 1943,1156 1943,1347.27 1930,1360.27 C8.1 ; U2.4 2006,1400.5 2036.5,1431 C8.1 ; C7.1 2030,1480 2057,1507 2073.78,1507 2076.78,1510 2140,1510 2280,1370 2280,1214.5 2314.5,1180 SW4.2
NetC15_2: C15.2 J8.3 U2.20
NetD1_1: D1.1 J1.3 U1.5 | length 1338.9
  Top Layer w10: 443.86,1280.72 400,1236.85 400,1126.03 393.51,1119.54 393.51,1003.51 320,930 320,884.22 319.5,883.72 319.5,693.86 355.86,657.5 369.67,657.5 472.17,555 534.31,555 561.31,528 561.31,408.69 561.08,408.47 561.08,180.01 569.87,171.22 587.15,171.22 D1.1
NetD1_3: D1.3 J1.2 U1.6 | length 1269.7
  Top Layer w10: 491.25,1249.22 529.88,1210.59 529.88,1098.77 340,908.89 340,877.71 339.5,877.21 339.5,702.79 364.79,677.5 399.19,677.5 471.69,605 534.31,605 590,549.31 590,243.17 D1.3
NetJ2_1: J2.1 J8.6 U2.16 | length 2337.1
  Top Layer w10: v2(870,1430) 870,1490 910,1530 910,1641.42 1248.58,1980 1410,1980 1440,2010 1440,2100 ; v2(910,1280) 1230,960 J2.1 1360,1010 1430.71,1010 1460,1039.29 1460,1080.71 1489.29,1110 1605.12,1110 1683.19,1031.93 U2.16 U2.16@1816.5,1036.93
  Bottom Layer w10: v2(870,1430) 870,1320 v2(910,1280)
NetJ2_2: J2.2 J8.5 U2.17 | length 2392.2
  Top Layer w10: v2(810,1350) 817.65,1357.65 817.65,1383.07 820,1385.41 820,1470 880,1530 880,1639.71 1240.29,2000 1320,2000 1340,2020 1340,2100 ; v2(860,1220) 1170,910 1360,910 J2.2 1460,1010 1755.11,1010 1766.13,998.98 1875,998.98 1880,993.98 U2.17
  Bottom Layer w10: v2(810,1350) 802.35,1342.35 810,1334.69 810,1270 v2(860,1220)
NetJ2_5: J2.5 J8.7 U2.15 | length 2179.6
  Top Layer w10: v2(940,1480) 940,1643.14 1256.86,1960 1504.14,1960 1516.29,1972.15 1516.29,2062.76 1540,2086.47 1540,2100 ; v2(1010,1330) 1181.28,1158.72 1311.28,1158.72 J2.5 1480,1130 1613.4,1130 1680.47,1062.93 U2.15 U2.15@1816.5,1067.93
  Bottom Layer w10: v2(940,1480) 1010,1410 v2(1010,1330)
NetJ7_3: J7.3 U2.32 | length 1008.5
  Top Layer w10: U2.32 2180.98,1251.93 2222.35,1293.29 2222.35,1322.35 v2(2230,1330) ; v2(2360,1450) 2360,1960 J7.3
  Bottom Layer w10: v2(2230,1330) 2350,1450 v2(2360,1450)
NetJ7_4: J7.4 U2.1 | length 951.5
  Top Layer w10: U2.1 2100,1330.98 2105,1335.98 2135.98,1335.98 2148.2,1348.2 2148.2,1357.38 2170,1379.18 v2(2170,1390) ; v2(2300,1490) 2300,2000 J7.4
  Bottom Layer w10: v2(2170,1390) 2262.35,1482.35 2292.35,1482.35 v2(2300,1490)
NetJ7_5: J7.5 U2.2 | length 910.6
  Top Layer w10: U2.2 2069,1389 2112.35,1432.35 2112.35,1452.35 v2(2120,1460) ; v2(2240,1540) 2240,2040 J7.5
  Bottom Layer w10: v2(2120,1460) 2157.83,1497.83 2197.83,1497.83 v2(2240,1540)
NetJ7_6: J7.6 U2.9 | length 1973.6
  Top Layer w10: v2(1360,1660) 1360,1372.29 1452.29,1280 1793.43,1280 U2.9 ; v2(1360,1800) 2020,1800 2200,1980 J7.6
  Bottom Layer w10: v2(1360,1660) v2(1360,1800)
NetJ7_7: J7.7 U2.10 | length 2075.8
  Top Layer w10: v2(1242.43,1757.57) 1242.43,1763.59 1318.83,1840 1990,1840 2110,1960 2110,2040 2100,2050 J7.7 ; v2(1300,1610) 1300,1404 1444,1260 1749.73,1260 1782.8,1226.93 1788.16,1226.93 1789.16,1225.93 1816.5,1225.93 U2.10
  Bottom Layer w10: v2(1242.43,1757.57) 1240,1755.15 1240,1670 v2(1300,1610)
NetJ7_8: J7.8 U2.11 | length 2133.8
  Top Layer w10: v2(1169.42,1690.58) 1175,1696.17 1175,1746.72 1298.28,1870 1960,1870 2030,1940 2030,2066.36 2000,2096.36 J7.8 ; v2(1240,1560) 1240,1435.72 1435.72,1240 1738.73,1240 1782.8,1195.93 1788.16,1195.93 1790.16,1193.93 1816.5,1193.93 U2.11
  Bottom Layer w10: v2(1169.42,1690.58) 1170,1690 1170,1630 v2(1240,1560)
NetJ8_1: J8.1 J11.1 R10.2 U2.28 | length 1169.4
  Top Layer w10: U2.28 2163.5,1120.93 2196.2,1120.93 2310,1007.13 2310,750 2700,360 J11.1
NetJ8_2: J8.2 J11.2 R9.2 U2.27 | length 1096.4
  Top Layer w10: U2.27 2163.5,1089.93 2195.2,1089.93 2270,1015.13 2270,750 2600,420 J11.2
NetJ8_8: J8.8 U2.14 | length 2068.1
  Top Layer w10: v2(1000,1530) 1000,1674.85 1265.15,1940 1580,1940 1640,2000 1640,2100 ; v2(1070,1380) 1271.28,1178.72 1705.01,1178.72 1783.8,1099.93 1816.5,1099.93 U2.14
  Bottom Layer w10: v2(1000,1530) 1042.29,1487.71 1042.29,1408.86 1070,1381.16 v2(1070,1380)
NetJ8_9: J8.9 U2.13 | length 2048
  Top Layer w10: v2(1060,1580) 1060,1706.57 1273.43,1920 1700,1920 1740,1960 1740,2100 ; v2(1130,1430) 1360.78,1199.22 1716.51,1199.22 1784.8,1130.93 1816.5,1130.93 U2.13
  Bottom Layer w10: v2(1060,1580) 1090,1550 1090,1470 v2(1130,1430)
NetJ8_10: J8.10 U2.12 | length 2014.8
  Top Layer w10: v2(1110,1640) 1110,1710 1300,1900 1780,1900 1840,1960 1840,2100 ; v2(1180,1490) 1187,1483 1187,1460.43 1220,1427.43 1427.43,1220 1726.73,1220 1782.8,1163.93 1788.16,1163.93 1789.16,1162.93 1816.5,1162.93 U2.12
  Bottom Layer w10: v2(1110,1640) 1115,1635 1115,1595 1175,1535 1175,1495 v2(1180,1490)
NetJ11_3: J11.3 U2.26 | length 1023.5
  Top Layer w10: U2.26 2163.5,1057.93 2196.2,1057.93 2220,1034.13 2220,740 2500,460 J11.3
NetJ11_4: J11.4 U2.25 | length 932
  Top Layer w10: U2.25 2158.5,740.98 2400,499.48 J11.4
NetJ11_5: J11.5 U2.24 | length 854.3
  Top Layer w10: U2.24 2100,678.77 2300,478.77 J11.5
NetJ11_6: J11.6 U2.23 | length 825.8
  Top Layer w10: U2.23 2069,646.77 2200,515.77 J11.6
NetLED1_2: LED1.2 R2.1 | length 140.4
  Top Layer w10: LED1.2 939,2089 R2.1
NetLED2_2: LED2.2 R1.1 | length 92
  Top Layer w10: R1.1 LED2.2
NetLED3_2: LED3.2 R3.1 | length 142
  Top Layer w10: R3.1 LED3.2
NetLED4_2: LED4.2 R5.1 | length 142
  Top Layer w10: LED4.2 R5.1
NetLED5_2: LED5.2 R6.1 | length 162
  Top Layer w10: LED5.2 R6.1
USBVCC: J1.1 LED2.1 SW2.1 | length 509.3
  Top Layer w20: J1.1 592.2,1312.2 SW2.1 698.57,1421.43 637.52,1421.43 579,1479.95 LED2.1
VIN: C14.2 J10.6 LED1.1 P1.1 SW2.3 | length 6317.6
  Top Layer w20: SW2.3 700,1770 800,1870 LED1.1 591,1971 P1.1 590,2198.28 601.72,2210 2948.28,2210 2960,2198.28 2960,1300 2940,1280 2940,800 2830,690 2830,259.29 2690.71,120 2080,120 J10.6 2002.43,202.43 2042.43,202.43 2120,280 C14.2@2120,320
pads on no net: D1.4 D1.6 J1.4 U1. U1.9 U1.10 U1.11 U1.12 U1.15 U2.19 U2.22

## Polygon pours and split planes (outlines as drawn)
GND on Bottom Layer "GND_L02_P000" (solid, pour order 0): 0,2500 3100,2500 3100,0 0,0

## Keep-outs
Keep-Out Layer:
  the board outline again, w20

## Silkscreen, mask and mechanical layers (free items; w line width, h text height)
Top Overlay:
  text "ECEN3730 Golden Arduino Board / Nathan Herrington 10/17/2023" at 80,2300 h40
  text "DIGITAL" at 1820,1910 h40
  text "AR_TX" at 2440,1876.66 h40
  text "AR_RX" at 2430,1646.66 h40
  text "USB" at 590,1300 h40
  text "1" at 1310,840 h40
  text "ANALOG IN" at 2290,380 h40
  text "3V3" at 1620,280 h40 r90
  text "Reset" at 1520,270 h35 r90
  text "5V" at 1670,270 h40
  text "GND" at 1790,270 h40
  text "Vin" at 1970,270 h40
  text "0" at 2190,270 h40
  text "1" at 2290,270 h40
  text "2" at 2390,270 h40
  text "3" at 2490,270 h40
  text "4" at 2590,270 h40
  text "5" at 2690,270 h40
  text "ECEN3730 Timer Board" at 2475,-8300 h60
  text "Nathan Herrington" at 2475,-8430.01 h60
  text "09-06-2023" at 2475,-8600 h60
  text "ECEN3730_brd_a_09-06-2023" at 2225,-8740 h60

## Text inside footprints (layer, text, board x,y; h text height)
J3: Top Overlay "D7" at 2811,2176.81 h30 r45; Top Overlay "D6~" at 2901,2152.07 h30 r45; Top Overlay "D4" at 3117,2175 h30 r45; Top Overlay "D3~" at 3201,2155 h30 r45; Top Overlay "D2" at 3314,2177 h30 r45; Top Overlay "D1" at 3421,2185 h30 r45; Top Overlay "D0" at 3511,2176.81 h30 r45; Top Overlay "D5~" at 3011,2152.07 h30 r45
J4: Top Overlay "D8" at 3419,2174.41 h30 r45; Top Overlay "D9~" at 3296,2149.67 h30 r45; Top Overlay "D10~" at 3187,2132 h30 r45; Top Overlay "D11~" at 3086,2135.53 h30 r45; Top Overlay "D12" at 2993,2156.74 h30 r45; Top Overlay "D13" at 2902,2156.74 h30 r45; Top Overlay "GND" at 2796,2153.21 h30 r45; Top Overlay "AREF" at 2669,2132 h30 r45; Top Overlay "SDA" at 2593,2153.21 h30 r45; Top Overlay "SCL" at 2501,2153.21 h30 r45
J7: Top Overlay "7" at 2000,1990 h30 r45; Top Overlay "0" at 2700,1997.07 h30 r45; Top Overlay "1" at 2610,2000 h30 r45; Top Overlay "3" at 2400,1990 h30 r45; Top Overlay "4" at 2300,1990 h30 r45; Top Overlay "5" at 2200,1990 h30 r45; Top Overlay "6" at 2110,1990 h30 r45; Top Overlay "2" at 2500,1990 h30 r45
J8: Top Overlay "D8" at 2519,2174.41 h30 r45; Top Overlay "D9~" at 2396,2149.67 h30 r45; Top Overlay "D10~" at 2287,2132 h30 r45; Top Overlay "D11~" at 2186,2135.53 h30 r45; Top Overlay "D12" at 2093,2156.74 h30 r45; Top Overlay "D13" at 2002,2156.74 h30 r45; Top Overlay "GND" at 1896,2153.21 h30 r45; Top Overlay "AREF" at 1769,2132 h30 r45; Top Overlay "SDA" at 1693,2153.21 h30 r45; Top Overlay "SCL" at 1601,2153.21 h30 r45